# EAGLE board RFBoardLayoutGen0_v01.3 (EAGLE 7.0.0)
AUTHOR: Kirchschlager Raimund
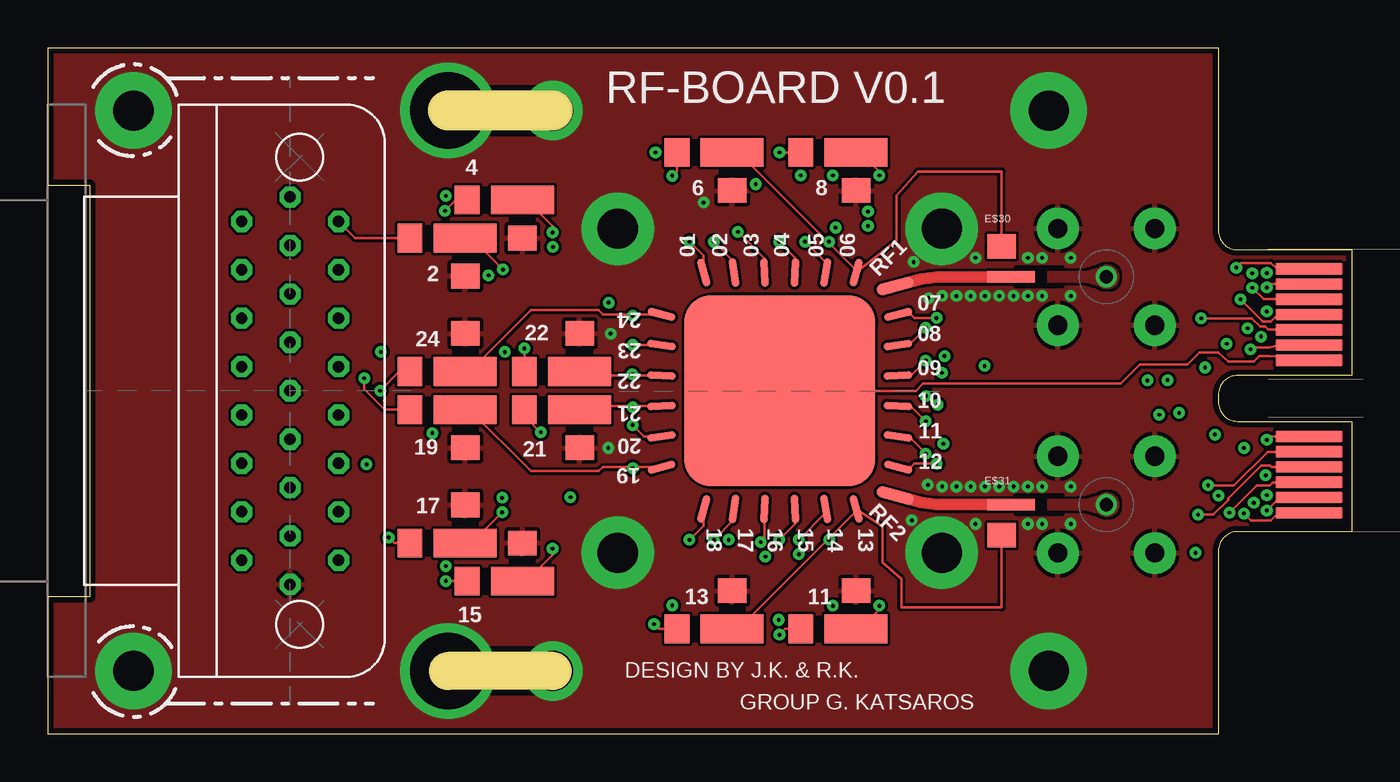
[diagram p0: board, top side]
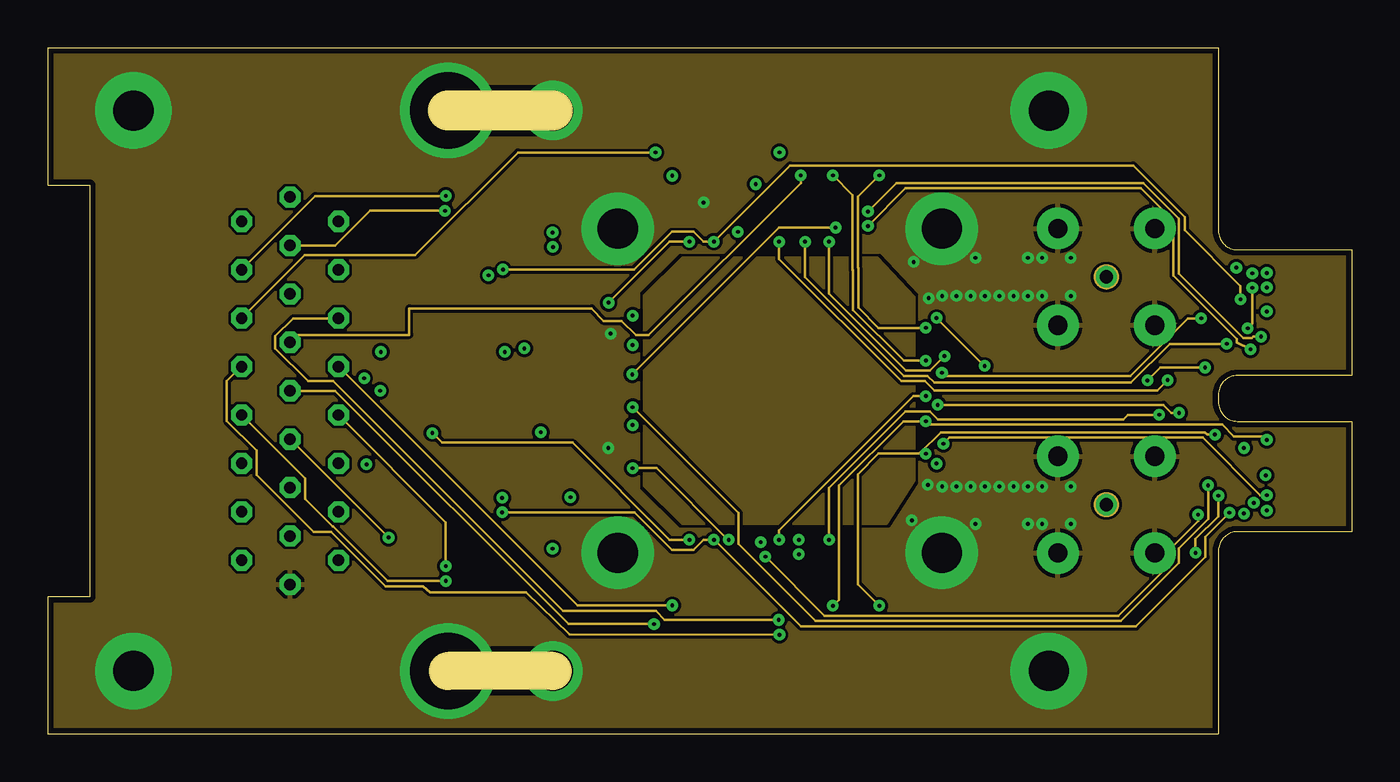
[diagram p1: board, inner layer Route2]
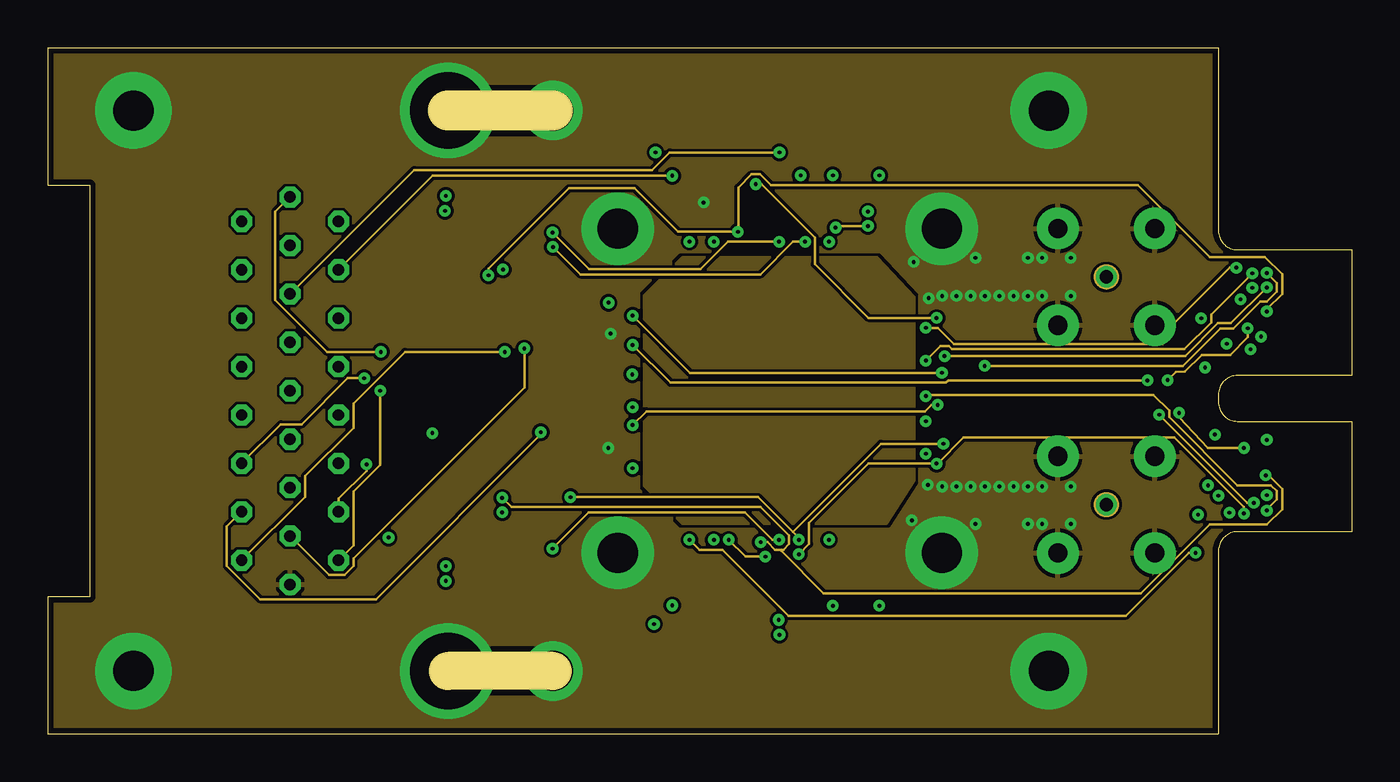
[diagram p2: board, inner layer Route15]
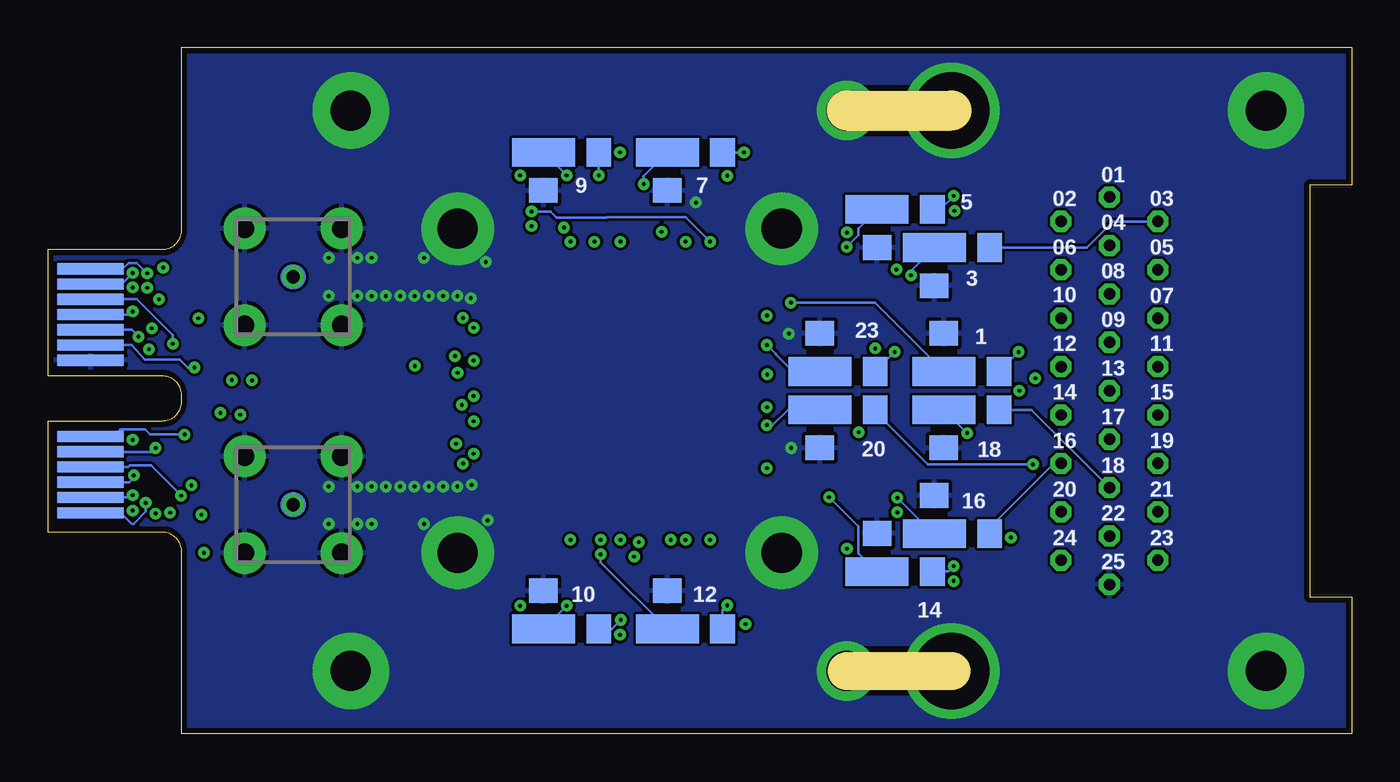
[diagram p3: board, bottom side, seen from below]

Size 68.4 x 36 mm. Coordinates in mm from the lower left corner, seen from the top.
Outline: 26.5,3.3 21,3.3
Outline: 26.5,32.7 21,32.7
Outline: 0,36 0,28.8 2.2,28.8 2.2,7.2 0,7.2 0,0 61.4,0 61.4,9.6 arc-90 62.4,10.6 68.4,10.6 68.4,16.4 62.4,16.4 arc-90 61.4,17.4 61.4,17.8 arc-90 62.4,18.8 68.4,18.8 68.4,25.4 62.4,25.4 arc-90 61.4,26.4 61.4,36 0,36
Copper layers (1+2*15+16): Top 0.035mm / dielectric 0.38mm / Route2 0.035mm / dielectric 0.71mm / Route15 0.035mm / dielectric 0.38mm / Bottom 0.035mm
Design rules "PCB-POOL HighSpec_ML4+ *": minimum track width 0.125mm, minimum drill 0.2mm, track to track 0.125mm, track to pad 0.125mm, pad to pad 0.125mm, via to via 0.125mm, smd to smd 0.125mm, copper to edge 0.3mm, drill to drill 0.2mm, minimum pad ring 10mil, minimum via ring 8mil, stop-mask expansion 0.075mm, vias tented up to drill 0.2mm, thermal gap 0.2mm
Net classes: 0 GND: clearance 0.15 mm; 1 RF: clearance 0.3 mm
tRestrict: 4 lines

## Footprints (pad centres in the part's own frame; a part is rotated, then mirrored left to right if it is on the bottom)
24DC+4RF/400MU-PADS/10.0X10.0_V1.1 = smd 10 x 10: BASE 0,0 | smd 2 x 0.6 rotated 345: P$1 6.05,-5.5 | smd 1.5 x 0.4 rotated 267: P$2 0.8,6.2 | smd 1.5 x 0.4 rotated 93: P$4 0.8,-6.2; P$40 -0.8,6.2 | smd 1.5 x 0.4 rotated 345: P$26 -6.2,4; P$37 6.2,-4 | smd 1.5 x 0.4 rotated 351: P$27 -6.2,2.4; P$36 6.2,-2.4 | smd 1.5 x 0.4 rotated 357: P$28 -6.2,0.8; P$35 6.2,-0.8 | smd 1.5 x 0.4 rotated 3: P$29 -6.2,-0.8; P$34 6.2,0.8 | smd 1.5 x 0.4 rotated 9: P$30 -6.2,-2.4; P$33 6.2,2.4 | smd 1.5 x 0.4 rotated 15: P$31 -6.2,-4; P$32 6.2,4 | smd 1.5 x 0.4 rotated 105: P$38 -4,6.2; P$49 4,-6.2 | smd 1.5 x 0.4 rotated 99: P$39 -2.4,6.2; P$48 2.4,-6.2 | smd 1.5 x 0.4 rotated 81: P$42 2.4,6.2; P$45 -2.4,-6.2 | smd 1.5 x 0.4 rotated 75: P$43 4,6.2; P$44 -4,-6.2 | smd 1.5 x 0.4 rotated 87: P$46 -0.8,-6.2 | smd 2 x 0.6 rotated 15: RF1@1 6.05,5.5
25_SOCKET_M83513/13-D = drill 0.6 octagon: 01 10.16,0; 02 8.89,2.54; 03 6.35,2.54; 04 3.81,2.54; 05 2.54,0; 06 1.27,2.54; 07 0,0; 08 -1.27,2.54; 09 -2.54,0; 10 -3.81,2.54; 11 -6.35,2.54; 12 -8.89,2.54; 13 -10.16,0; 14 8.89,-2.54; 15 7.62,0; 16 6.35,-2.54; 17 5.08,0; 18 3.81,-2.54; 19 1.27,-2.54; 20 -1.27,-2.54; 21 -3.81,-2.54; 22 -5.08,0; 23 -6.35,-2.54; 24 -7.62,0; 25 -8.89,-2.54
MEC8-113-02-L-D-RA1 = smd 0.6 x 3.5: 129 -6.4,0.15; 130 -5.6,0.15; 131 -4.8,0.15; 132 -4,0.15; 133 -3.2,0.15; 134 -2.4,0.15; 135 -1.6,0.15; 136 2.4,0.15; 137 3.2,0.15; 138 4,0.15; 139 4.8,0.15; 140 5.6,0.15; 141 6.4,0.15 | smd 0.6 x 3.5 bottom: 157 -6.4,0.15; 158 -5.6,0.15; 159 -4.8,0.15; 160 -4,0.15; 161 -3.2,0.15; 162 -2.4,0.15; 163 -1.6,0.15; 168 2.4,0.15; 169 3.2,0.15; 170 4,0.15; 171 4.8,0.15; 172 5.6,0.15; 173 6.4,0.15
LP-FILTER/1_STAGE/OS/V1_01 = smd 1.3 x 1.5: $1 -2.9,0.01 | smd 3.3 x 1.5: $2 0,0.01 | smd 1.5 x 1.3: GND@1 0,-1.99
LP-FILTER/1_STAGE/OS/V1_02 = smd 3.3 x 1.5: $4 0,0.01 | smd 1.3 x 1.5: $6 -2.9,0.01 | smd 1.5 x 1.3: GND@3 0,2.01
LP-FILTER/1_STAGE/OS/V1_03 = smd 3.3 x 1.5 bottom: $4 0,0.01 | smd 1.3 x 1.5 bottom: $6 -2.9,0.01 | smd 1.5 x 1.3 bottom: GND@3 0,2.01
LP-FILTER/1_STAGE/OS/V1_04 = smd 1.3 x 1.5 bottom: $1 -2.9,0.01 | smd 3.3 x 1.5 bottom: $2 0,0.01 | smd 1.5 x 1.3 bottom: GND@1 0,-1.99
SMP_STRAIGHT_V02 = drill 1 pad 2.184: P$3 -2.54,2.54; P$4 2.54,2.54; P$5 2.54,-2.54; P$6 -2.54,-2.54
BIAS_TEE_DOWN_V01 = smd 1.5 x 1.3: P$1 0,0.95 | smd 2.5 x 0.6: P$2 0.5,-0.65
BIAS_TEE_UP_V01 = smd 1.5 x 1.3: P$1 0,-0.95 | smd 2.5 x 0.6: P$2 0.5,0.65

## Placement (x,y rotation side)
E$1  [24DC+4RF/400MU-PADS/10.0X10.0_V1.1]  38.4,18 0 top
E$2  [25_SOCKET_M83513/13-D]  12.71,18 90 top
E$3  [MEC8-113-02-L-D-RA1]  66,18 270 top
E$4  [LP-FILTER/1_STAGE/OS/V1_01]  24.9,28 0 top
E$5  [LP-FILTER/1_STAGE/OS/V1_02]  24.9,8 0 top
E$6  [LP-FILTER/1_STAGE/OS/V1_01]  21.9,26 0 top
E$7  [LP-FILTER/1_STAGE/OS/V1_01]  21.9,17 0 top
E$8  [LP-FILTER/1_STAGE/OS/V1_02]  21.9,19 0 top
E$9  [LP-FILTER/1_STAGE/OS/V1_02]  35.9,5.5 0 top
E$10  [LP-FILTER/1_STAGE/OS/V1_01]  35.9,30.5 0 top
E$11  [LP-FILTER/1_STAGE/OS/V1_02]  27.9,19 0 top
E$12  [LP-FILTER/1_STAGE/OS/V1_02]  21.9,10 0 top
E$13  [LP-FILTER/1_STAGE/OS/V1_02]  42.4,5.5 0 top
E$14  [LP-FILTER/1_STAGE/OS/V1_01]  42.4,30.5 0 top
E$15  [LP-FILTER/1_STAGE/OS/V1_01]  27.9,17 0 top
E$16  [LP-FILTER/1_STAGE/OS/V1_03]  21.4,19 0 top
E$17  [LP-FILTER/1_STAGE/OS/V1_03]  21.9,10.5 0 top
E$18  [LP-FILTER/1_STAGE/OS/V1_03]  24.9,8.5 0 top
E$19  [LP-FILTER/1_STAGE/OS/V1_03]  27.9,19 0 top
E$20  [LP-FILTER/1_STAGE/OS/V1_04]  24.9,27.5 0 top
E$21  [LP-FILTER/1_STAGE/OS/V1_04]  21.4,17 0 top
E$22  [LP-FILTER/1_STAGE/OS/V1_04]  27.9,17 0 top
E$23  [LP-FILTER/1_STAGE/OS/V1_04]  21.9,25.5 0 top
E$24  [LP-FILTER/1_STAGE/OS/V1_04]  35.9,30.5 0 top
E$25  [LP-FILTER/1_STAGE/OS/V1_04]  42.4,30.5 0 top
E$26  [SMP_STRAIGHT_V02]  55.52,23.98 0 top
E$27  [LP-FILTER/1_STAGE/OS/V1_03]  35.9,5.5 0 top
E$28  [LP-FILTER/1_STAGE/OS/V1_03]  42.4,5.5 0 top
E$29  [SMP_STRAIGHT_V02]  55.52,12.03 0 top
E$30  [BIAS_TEE_DOWN_V01]  50.02,24.62 0 top
E$31  [BIAS_TEE_UP_V01]  50.02,11.38 0 top

## Library data of the parts
E$1 = SampleArea
E$2 = Glenair
E$3 = MEC8-130-02-X-D-RA1
E$4-E$25 E$27 E$28 = LPFilter
E$26 E$29 = RF Connectors
E$30 E$31 = Bias tee

## Nets
GND1: E$2.13 E$3.163 E$4.GND@1 E$5.GND@3 E$6.GND@1 E$7.GND@1 E$8.GND@3 E$9.GND@3 E$10.GND@1 E$11.GND@3 E$12.GND@3 E$13.GND@3 E$14.GND@1 E$15.GND@1 E$16.GND@3 E$17.GND@3 E$18.GND@3 E$19.GND@3 E$20.GND@1 E$21.GND@1 E$22.GND@1 E$23.GND@1 E$24.GND@1 E$25.GND@1 E$26.P$3 E$26.P$4 E$26.P$5 E$26.P$6 E$27.GND@3 E$28.GND@3 E$29.P$3 E$29.P$4 E$29.P$5 E$29.P$6
S$55: E$1.P$28 E$3.134 E$11.$4
S$67: E$2.24 E$11.$6
S$68: E$1.P$29 E$3.137 E$15.$2
S$76: E$2.11 E$15.$1
S$79: E$1.P$27 E$3.162 E$19.$4
S$80: E$2.12 E$19.$6
S$81: E$1.P$30 E$3.169 E$22.$2
S$83: E$2.23 E$22.$1
S$84: E$1.P$26 E$3.133 E$8.$4
S$85: E$2.25 E$8.$6
S$86: E$1.P$38 E$3.161 E$16.$4
S$88: E$2.01 E$16.$6
S$89: E$1.P$31 E$3.138 E$7.$2
S$90: E$2.10 E$7.$1
S$91: E$1.P$44 E$3.170 E$21.$2
S$95: E$2.22 E$21.$1
S$116: E$1.P$39 E$3.132 E$6.$2
S$144: E$2.14 E$6.$1
S$145: E$1.P$40 E$3.160 E$23.$2
S$146: E$2.02 E$23.$1
S$147: E$1.P$2 E$3.131 E$4.$2
S$149: E$2.15 E$4.$1
S$150: E$1.P$42 E$3.159 E$20.$2
S$151: E$2.03 E$20.$1
S$152: E$1.P$45 E$3.139 E$12.$4
S$154: E$2.09 E$12.$6
S$155: E$1.P$46 E$3.171 E$17.$4
S$156: E$2.21 E$17.$6
S$157: E$1.P$4 E$3.140 E$5.$4
S$158: E$2.08 E$5.$6
S$159: E$1.P$48 E$3.172 E$18.$4
S$160: E$2.20 E$18.$6
S$161: E$1.P$43 E$3.130 E$10.$2 E$30.P$1
S$162: E$2.16 E$10.$1
S$163: E$1.P$32 E$3.158 E$24.$2
S$164: E$2.04 E$24.$1
S$166: E$1.P$49 E$3.173 E$9.$4 E$31.P$1
S$167: E$1.P$33 E$3.129 E$14.$2
S$168: E$2.17 E$14.$1
S$169: E$1.P$34 E$3.157 E$25.$2
S$170: E$2.05 E$25.$1
S$171: E$2.07 E$9.$6
S$172: E$1.P$37 E$3.141 E$27.$4
S$173: E$2.19 E$27.$6
S$174: E$1.P$36 E$3.168 E$13.$4
S$175: E$2.06 E$13.$6
S$177: E$1.P$35 E$3.136 E$28.$4
S$178: E$2.18 E$28.$6
S$181: E$1.BASE E$3.135

## Tracks (layer width: path | path; a pad name or v marks a point on that pad's centre or on a via)
GND1  (via drill 0.2, 2.1, 2.1 pad 3.8, 2.1 pad 4, 4)
  other vias: 46.9,26.5 52.5,32.7 29.9,26.5 29.9,9.5 46.9,9.5 4.5,32.7 4.5,3.3 52.5,3.3 34.4,27.88 29.52,21 29.4,15 53.66,22.98 52.16,22.98 51.41,22.98 50.66,22.98 49.91,22.98 49.16,22.98 48.41,22.98 47.66,22.98 46.91,22.98 46.21,22.86 48.66,24.98 45.42,24.75 51.41,24.98 52.16,24.98 53.66,24.98 53.66,12.97 52.16,12.97 51.41,12.97 50.66,12.97 49.91,12.97 49.16,12.97 48.41,12.97 47.66,12.97 46.91,12.97 46.16,13.07 53.66,11.02 52.16,11.02 51.41,11.02 48.66,11.02 45.32,11.21 21,3.3 21,32.7 26.5,32.7 26.5,3.3
  pour Top (rank 6): -4.85,39.6 73.1,39.7 73.1,-4.7 -4.85,-4.8
  pour Route2 (rank 6): -7.5,41.1 73.6,41.6 73.6,-5.15 -7.5,-5.65
  pour Route15 (rank 6): -11.25,44.5 75.9,44.5 75.9,-11.4 -11.25,-11.4
  pour Bottom (rank 6): -16.65,49.3 78.15,49.2 78.15,-15.85 -16.65,-15.75
RF1
  Top 0.6: 43.8,23.32 45.42,23.76 arc-15 47.01,23.98 51,23.98
RF2
  Top 0.6: 51,12.03 47.01,12.03 arc-15 45.42,12.24 43.78,12.68
RF3  (via drill 0.7)
  other vias: 55.52,23.98
  pour Top: 52.42,24.27 54.12,24.27 arc27 55.27,24.55 arc-234 55.27,23.4 arc27 54.12,23.68 52.42,23.68
RF4  (via drill 0.7)
  other vias: 55.52,12.03
  pour Top: 52.42,12.32 54.12,12.32 arc27 55.27,12.6 arc-234 55.27,11.45 arc27 54.12,11.72 52.42,11.72
S$1
  Route15 1.3: 55.5,23.98 55.55,23.98
S$2
  Route2 1.3: 55.5,23.98 55.55,23.98
S$12
  Route2 1.3: 55.5,12.03 55.55,12.03
S$17
  Bottom 1.3: 55.5,23.98 55.55,23.98
S$55  (via drill 0.2)
  Top 0.125: 30.66,18.8 28.1,18.8 E$11.$4 | 30.66,18.8 E$1.P$28 | E$3.134 64.62,20.4 64.07,20.28 63.2,20.28 v63.08,20.18 | v30.66,18.86 30.66,18.8
  Route2 0.125: v43.02,26.64 45,28.62 57.34,28.62 59.04,26.92 59.04,24.04 62.36,20.72 62.36,20.54 v63.08,20.18 | v41.32,26.56 38.36,26.56 v30.66,18.86
  Route15 0.125: v43.02,26.64 41.4,26.64 v41.32,26.56
S$67  (via drill 0.2)
  Top 0.125: v25,20.22 E$11.$6
  Route15 0.125: v25,20.22 25,18.16 16.04,9.2 16.04,8.8 15.58,8.34 14.76,8.34 E$2.24
S$68  (via drill 0.2)
  Top 0.125: 30.68,17.2 28.08,17.2 E$15.$2 | 30.68,17.2 E$1.P$29 | E$3.137 63.98,14.8 62.22,13.04 v60.86,13.04 | v30.68,17.14 30.68,17.2
  Route2 0.125: v60.86,13.04 60.86,11.28 59.32,9.74 59.32,8.96 56.28,5.92 40.28,5.92 36.24,9.96 36.24,11.58 v30.68,17.14
S$76  (via drill 0.2)
  Top 0.125: E$15.$1 25,16.68 v25.86,15.82
  Route15 0.125: v25.86,15.82 25.86,15.7 17.22,7.06 11.14,7.06 9.4,8.8 9.4,10.88 10.16,11.64 E$2.11
S$79  (via drill 0.2)
  Top 0.125: v30.68,20.4 E$1.P$27
  Route2 0.125: v60.7,19.22 58.36,19.22 v57.68,18.54
  Route15 0.125: v57.68,18.54 47.24,18.54 47.12,18.42 32.66,18.42 v30.68,20.4
  Bottom 0.125: v30.68,20.4 30.2,19.92 30.2,19.9 29.32,19.02 E$19.$4 | E$3.162 63.99,20.39 63.32,19.64 63.12,19.65 61.47,19.65 61.05,19.22 v60.7,19.22
S$80  (via drill 0.2)
  Route15 0.125: v23.98,20.04 18.74,20.04 16.04,17.34 16.04,16.06 13.5,13.52 13.5,12.44 E$2.12
  Bottom 0.125: v23.98,20.04 E$19.$6
S$81  (via drill 0.2)
  Top 0.125: E$1.P$30 31.28,15.6 v30.68,16.2
  Route2 0.125: v59.34,16.84 58.94,16.84 58.52,17.26 v46.68,17.26
  Route15 0.125: v62.74,15 60.85,15 59.35,16.6 v59.34,16.84 | v46.68,17.26 46.34,17.26 46,16.92 31.4,16.92 v30.68,16.2
  Bottom 0.125: v30.68,16.2 30.38,16.2 29.58,17 E$22.$2 | E$3.169 62.94,14.8 v62.74,15
S$82
  pour Route15: 43.96,11.01 33.3,11.01 31.3,12.99 31.3,23.02 33.3,25 43.5,25 45.43,22.94 45.43,13.29
S$83  (via drill 0.2)
  Route15 0.125: v16.72,14.14 16.72,13.8 15.26,12.34 E$2.23
  Bottom 0.125: E$22.$1 25,16.9 22.24,14.14 v16.72,14.14
S$84  (via drill 0.2)
  Top 0.125: 30.68,22 29.14,22 28.9,22.24 25.36,22.24 22.14,19.02 E$8.$4 | 30.68,22 E$1.P$26 | E$3.133 64.02,21.2 63.86,21.36 63.6,21.36 63.16,21.8 v60.5,21.8 | v30.68,21.94 30.68,22
  Route2 0.125: v60.5,21.8 59.8,21.8 56.78,18.78 47.06,18.78 v46.9,18.94
  Route15 0.125: v46.9,18.94 33.68,18.94 v30.68,21.94
S$85  (via drill 0.2)
  Top 0.125: v17.44,18 18.44,19 E$8.$6
  Route15 0.125: v17.44,18 17.44,14.12 16.04,12.72 16.04,9.9 E$2.25
S$86  (via drill 0.2)
  Top 0.125: E$1.P$38 34.4,25.08 v33.66,25.82
  Route2 0.125: v33.66,25.82 32.62,25.82 v29.42,22.62 | v63.64,20.84 63.24,20.84 63.16,20.76 62.72,20.76 59.32,24.16 59.32,27.04 57.46,28.9 44.52,28.9 v43.02,27.4
  Bottom 0.125: v29.42,22.62 25.02,22.62 E$16.$4 | E$3.161 64,21.2 v63.64,20.84 | v43.02,27.4 42.02,27.4 41.7,27.08 39.08,27.08 39.06,27.1 34.94,27.1 v33.66,25.82
S$88  (via drill 0.2)
  Route15 0.125: v17.48,20.04 14.66,20.04 11.94,22.76 11.94,27.4 12.7,28.16 E$2.01
  Bottom 0.125: v17.48,20.04 E$16.$6
S$89  (via drill 0.2)
  Top 0.125: 30.68,14 29.12,14 28.9,13.78 25.36,13.78 22.14,17 E$7.$2 | 30.68,14 E$1.P$31 | E$3.138 64.18,14 64.1,14.08 63.66,14.08 61.92,12.34 61.92,12.28 61.14,11.5 v60.34,11.5 | v30.68,13.94 30.68,14
  Route2 0.125: v60.34,11.5 60.34,11.16 59.04,9.86 59.04,9.08 56.16,6.2 40.74,6.2 v37.64,9.3 | v35.72,10.18 35.68,10.18 31.92,13.94 v30.68,13.94
  Route15 0.125: v37.64,9.3 36.6,9.3 v35.72,10.18
S$90  (via drill 0.2)
  Top 0.125: v16.6,18.66 16.6,18.1 17.68,17.02 E$7.$1
  Route15 0.125: v16.6,18.66 15.74,18.66 13.32,16.24 12.22,16.24 E$2.10
S$91  (via drill 0.2)
  Top 0.125: E$1.P$44 34.4,10.92 v33.66,10.18
  Route2 0.125: v33.66,10.18 32.62,10.18 27.52,15.28 20.68,15.28 v20.18,15.78 | v61.4,12.5 61.4,11.42 60.2,10.22 v60.2,9.5
  Route15 0.125: v60.2,9.5 59.86,9.5 56.56,6.2 38.86,6.2 35.4,9.66 34.18,9.66 v33.66,10.18
  Bottom 0.125: v20.18,15.78 E$21.$2 | E$3.170 64.18,14 64.1,14.08 62.98,14.08 v61.4,12.5
S$95
  Bottom 0.125: E$21.$1 16.8,17 E$2.22
S$116  (via drill 0.2)
  Top 0.125: E$1.P$39 36,24.76 v34.94,25.82 | v23.88,24.36 22.24,26 E$6.$2 | E$3.132 64.52,22 64.16,21.64 63.72,21.64 v62.56,22.8
  Route2 0.125: v23.88,24.36 30.76,24.36 32.74,26.34 33.88,26.34 34.4,25.82 v34.94,25.82 38.94,29.82 56.94,29.82 59.64,27.12 59.64,26.42 62.56,23.5 v62.56,22.8
S$144
  Top 0.125: E$6.$1 16.12,26.02 E$2.14
S$145  (via drill 0.2)
  Top 0.125: E$1.P$40 37.6,24.94 v36.2,26.34
  Route15 0.125: v23.12,24.06 23.12,24.4 27.34,28.62 30.78,28.62 33.06,26.34 v36.2,26.34 36.22,26.4 36.22,28.66 36.92,29.36 37.36,29.36 37.94,28.78 57.18,28.78 60.94,25.02 63.84,25.02 64.74,24.12 64.74,23.08 63.94,22.28 v63.94,22.16
  Bottom 0.125: v23.12,24.06 23.12,24.28 E$23.$2 | E$3.160 64.1,22 v63.94,22.16
S$146
  Bottom 0.125: E$23.$1 13.9,25.52 12.54,26.88 E$2.02
S$147  (via drill 0.2)
  Top 0.125: E$1.P$2 39.2,24.98 v38.36,25.82 | v26.48,26.3 26.48,26.64 25.12,28 E$4.$2 | E$3.131 63.78,22.8 v63.18,23.4
  Route2 0.125: v63.18,23.4 63.18,21.52 v62.94,21.28 | v58.74,18.56 58.2,18.02 46.5,18.02 46.02,18.5 44.78,18.5 38.36,24.92 v38.36,25.82
  Route15 0.125: v38.36,25.82 35.68,25.82 34.24,24.38 28.4,24.38 v26.48,26.3 | v62.94,21.28 62.94,20.82 62.02,19.88 60.52,19.88 59.65,19 59.16,18.98 v58.74,18.56
S$149  (via drill 0.2)
  Top 0.125: v20.84,27.44 21.4,28 E$4.$1
  Route2 0.125: v20.84,27.44 16.9,27.44 15.08,25.62 E$2.15
S$150  (via drill 0.2)
  Top 0.125: E$1.P$42 40.8,24.74 v39.72,25.82
  Route2 0.125: v61.84,20.46 58.86,20.46 56.82,18.42 46.5,18.42 46.14,18.78 44.9,18.78 39.72,23.96 v39.72,25.82
  Route15 0.125: v39.72,25.82 39.1,25.82 37.38,24.1 27.94,24.1 v26.5,25.54
  Bottom 0.125: v26.5,25.54 25.88,26.16 25.88,26.52 E$20.$2 | E$3.159 63.72,22.8 61.84,20.92 v61.84,20.46
S$151  (via drill 0.2)
  Route2 0.125: v20.88,28.22 14.04,28.22 E$2.03
  Bottom 0.125: v20.88,28.22 21.58,27.52 E$20.$1
S$152  (via drill 0.2)
  Top 0.125: E$1.P$45 36,11.24 v34.94,10.18 | v23.84,11.62 22.24,10.02 E$12.$4 | E$3.139 64.26,13.2 64.1,13.04 63.42,13.04 v61.98,11.6
  Route2 0.125: v23.84,11.62 30.78,11.62 32.74,9.66 33.88,9.66 34.4,10.18 v34.94,10.18 35,10.16 39.52,5.64 57.08,5.64 60.72,9.28 60.72,10.34 v61.98,11.6
S$154  (via drill 0.2)
  Top 0.125: v17.88,10.3 18.16,10.02 E$12.$6
  Route2 0.125: v17.88,10.3 E$2.09
S$155  (via drill 0.2)
  Top 0.125: E$1.P$46 37.6,10.26 v37.4,10.06
  Route15 0.125: v37.4,10.06 37.74,10.06 38.14,9.66 38.48,9.66 | 38.48,9.66 38.58,9.66 38.88,9.96 38.88,10.4 37.38,11.9 24.32,11.9 v23.84,12.38 | v63.88,13.56 64.04,13.56 64.74,12.86 64.74,11.78 63.94,10.98 60.94,10.98 57.34,7.38 40.7,7.38 38.48,9.6 38.48,9.66
  Bottom 0.125: v23.84,12.38 21.98,10.52 E$17.$4 | E$3.171 64.12,13.2 63.88,13.44 v63.88,13.56
S$156
  Bottom 0.125: E$17.$6 19,10.8 15.62,14.18 E$2.21
S$157  (via drill 0.2)
  Top 0.125: E$1.P$4 39.2,11.02 v38.36,10.18 | v26.48,9.72 26.48,9.38 25.12,8.02 E$5.$4 | E$3.140 64.62,12.4 v63.94,11.72
  Route2 0.125: v46.06,17.72 45.4,17.72 38.36,10.68 v38.36,10.18
  Route15 0.125: v38.36,10.18 38.02,10.18 36.58,11.62 28.38,11.62 v26.48,9.72 | v63.94,11.72 63.94,11.78 64.46,12.3 64.46,12.74 64.16,13.04 62.4,13.04 58.82,16.62 58.82,16.96 58,17.78 46.12,17.78 v46.06,17.72
S$158  (via drill 0.2)
  Top 0.125: v20.88,8.02 E$5.$6
  Route2 0.125: v20.88,8.02 17.84,8.02 14.98,10.88 14.94,10.88 13.5,12.32 13.5,13.4 E$2.08
S$159  (via drill 0.2)
  Top 0.125: E$1.P$48 40.8,11.58 v39.4,10.18
  Route2 0.125: v63.94,12.52 63.6,12.52 60.58,15.54 47.3,15.54 v46.98,15.22
  Route15 0.125: v39.4,10.18 39.4,10.28 39.08,10.6 | 39.08,10.6 37.26,12.42 v27.42,12.42 | v46.98,15.22 43.7,15.22 39.08,10.6
  Bottom 0.125: v27.42,12.42 25.88,10.88 25.88,9.48 E$18.$4 | E$3.172 64.06,12.4 v63.94,12.52
S$160  (via drill 0.2)
  Route2 0.125: v20.88,8.8 20.88,11.1 E$2.20
  Bottom 0.125: v20.88,8.8 21.16,8.52 E$18.$6
S$161  (via drill 0.2)
  Top 0.125: 40.94,25.78 36.22,30.5 E$10.$2 | 40.94,25.78 42.4,24.32 E$1.P$43 44.52,25.88 44.52,28.25 45.65,29.5 50.02,29.5 E$30.P$1 | E$3.130 64.12,23.6 v63.94,23.42 | v40.98,25.82 40.94,25.78
  Route2 0.125: v47.04,19.82 46.28,19.06 45.02,19.06 40.98,23.1 v40.98,25.82
  Route15 0.125: v63.94,23.42 62.06,21.54 61.38,21.54 59.66,19.82 v47.04,19.82
S$162  (via drill 0.2)
  Top 0.125: E$10.$1 33,29.52 v32.76,29.28
  Route15 0.125: v32.76,29.28 20.18,29.28 E$2.16
S$163  (via drill 0.2)
  Top 0.125: E$1.P$32 45.28,22 45.46,21.82 v46.62,21.82
  Route2 0.125: v46.62,21.82 v49.14,19.3
  Route15 0.125: v46.62,21.82 43.06,21.82 40.24,24.64 40.24,26.04 37.44,28.84 v37.14,28.84 | v63.94,24.18 64.46,23.66 64.46,23.2 63.94,22.68 63.6,22.68 62.18,21.26 61.5,21.26 59.54,19.3 v49.14,19.3
  Bottom 0.125: v37.14,28.84 37.14,29.26 E$24.$2 | E$3.158 64.52,23.6 v63.94,24.18
S$164  (via drill 0.2)
  Route2 0.125: v31.88,30.5 24.66,30.5 19.28,25.12 13.48,25.12 E$2.04
  Bottom 0.125: v31.88,30.5 E$24.$1
S$165
  pour Route2: 43.96,11.01 33.3,11.01 31.3,12.99 31.3,23.02 33.3,25 43.5,25 45.43,22.94 45.43,13.29
S$166  (via drill 0.2)
  Top 0.125: 40.94,10.22 36.24,5.52 E$9.$4 | 40.94,10.22 42.4,11.68 E$1.P$49 43.77,10.88 43.77,9 44.77,8.12 44.77,6.62 50.02,6.62 E$31.P$1 | v40.98,10.18 40.94,10.22
  Route2 0.125: v58.3,16.74 56.66,16.74 56.42,16.5 46.7,16.5 46.28,16.92 45,16.92 40.98,12.9 v40.98,10.18
  Route15 0.125: v63.26,12.12 62.92,12.12 v58.3,16.74
  Bottom 0.125: E$3.173 64.56,11.6 63.98,11.02 63.9,11.02 63.26,11.66 v63.26,12.12
S$167  (via drill 0.2)
  Top 0.125: E$1.P$33 45.16,20.4 v46.06,21.3 | v43.62,29.3 43.62,29.5 42.62,30.5 E$14.$2 | E$3.129 64.46,24.4 64.16,24.7 62.58,24.7 v62.34,24.46
  Route2 0.125: v46.06,21.3 43.58,21.3 42.52,22.36 42.52,24.44 42.5,24.46 42.5,28.18 v43.62,29.3
  Route15 0.125: v62.34,24.46 62,24.46 59.04,21.5 59.04,21.04 58.46,20.46 47.54,20.46 46.7,21.3 v46.06,21.3
S$168  (via drill 0.2)
  Top 0.125: v38.38,30.5 E$14.$1
  Route15 0.125: v38.38,30.5 32.62,30.5 31.7,29.58 19.22,29.58 E$2.17
S$169  (via drill 0.2)
  Top 0.125: E$1.P$34 45.28,18.8 v46.06,19.58
  Route2 0.125: v46.06,19.58 44.9,19.58 42.24,22.24 42.24,24.32 42.22,24.34 42.22,28.26 v41.18,29.3
  Route15 0.125: v63.18,24.16 61.02,22 61.02,21.58 59.62,20.18 47.42,20.18 47.26,20.34 46.82,20.34 v46.06,19.58
  Bottom 0.125: v41.18,29.3 E$25.$2 | E$3.157 64.46,24.4 64.16,24.7 63.72,24.7 v63.18,24.16
S$170  (via drill 0.2)
  Route2 0.125: v39.5,29.3 39.5,28.9 31.52,20.92 30.87,20.92 30.1,21.67 29.16,21.67 28.53,22.32 18.96,22.32 18.96,20.93 13.1,20.92 | 13.1,20.92 E$2.05 13.1,20.92
  Bottom 0.125: v39.5,29.3 E$25.$1
S$171  (via drill 0.2)
  Top 0.125: v31.8,5.76 32.04,5.52 E$9.$6
  Route2 0.125: v31.8,5.76 27.32,5.76 15.08,18 E$2.07
S$172  (via drill 0.2)
  Top 0.125: E$1.P$37 45.28,14 45.46,14.18 v46.62,14.18 | E$3.141 64.56,11.6 64.16,11.2 63.1,11.2 v62.74,11.56
  Route15 0.125: v39.4,9.42 39.94,9.96 39.94,11.06 43.06,14.18 v46.62,14.18 46.68,14.18 48.04,15.54 59.1,15.54 62.74,11.9 v62.74,11.56
  Bottom 0.125: v39.4,9.42 39.4,9 E$27.$4
S$173  (via drill 0.2)
  Route2 0.125: v32.76,6.74 27.78,6.74 E$2.19
  Bottom 0.125: E$27.$6 33,6.5 v32.76,6.74
S$174  (via drill 0.2)
  Top 0.125: E$1.P$36 45.16,15.6 v46.06,14.7 | v43.62,6.72 43.62,6.52 42.62,5.52 E$13.$4
  Route2 0.125: v43.62,6.72 42.5,7.84 42.5,13.62 43.58,14.7 v46.06,14.7 45.78,14.76 46.84,15.82 60.7,15.82 60.82,15.7 v61.22,15.7
  Bottom 0.125: E$3.168 64.93,15.6 64.58,15.97 63.3,15.97 63.02,15.7 v61.22,15.7
S$175  (via drill 0.2)
  Top 0.125: v38.38,5.2 38.68,5.5 E$13.$6
  Route2 0.125: v38.38,5.2 27.36,5.22 25.1,7.43 20.05,7.43 19.7,7.74 17.72,7.74 14.86,10.6 13.94,10.6 10.96,13.58 10.96,14.86 9.4,16.42 9.4,18.5 10.16,19.26 E$2.06
S$176
  Bottom 1.3: 55.5,12.03 55.55,12.03
S$177  (via drill 0.2)
  Top 0.125: E$1.P$35 45.26,17.2 v46.06,16.4 | v63.94,15.43 64.12,15.6 E$3.136
  Route2 0.125: v41.18,6.72 41.5,7.04 41.5,13.02 44.88,16.4 v46.06,16.4 46.12,16.38 46.28,16.22 61.59,16.22 62.2,15.6 63.72,15.6 v63.94,15.43
  Bottom 0.125: v41.18,6.72 E$28.$4
S$178  (via drill 0.2)
  Route2 0.125: v38.34,5.98 32.36,5.98 31.9,6.44 27.04,6.44 14.98,18.5 13.66,18.5 11.94,20.22 11.94,20.86 12.88,21.8 15.24,21.8 E$2.18
  Bottom 0.125: v38.34,5.98 38.8,5.52 E$28.$6
S$180
  Route15 1.3: 55.5,12.03 55.55,12.03
S$181
  Top 0.125: E$1.BASE 45.52,18 45.9,18.38 56.27,18.38 57.27,19.38 59.77,19.38 60.4,20 61.4,20 61.92,19.52 63.27,19.52 63.54,19.82 64.05,19.82 64.6,19.8 E$3.135

## Text on the board
tPlace: RF-BOARD V0.1 | 4 | 6 | 8 | 2 | RF1 | 22 | 24 | 19 | 21 | 17 | RF2 | 13 | 11 | 15 | DESIGN BY J.K. & R.K. | GROUP G. KATSAROS
bPlace: 01 | 03 | 02 | 5 | 7 | 9 | 04 | 05 | 06 | 08 | 3 | 07 | 10 | 09 | 11 | 12 | 23 | 13 | 1 | 15 | 14 | 17 | 19 | 16 | 18 | 20 | 18 | 21 | 20 | 22 | 16 | 23 | 24 | 25 | 12 | 10 | 14
CopperPlate: 03